# Altium PCB Motherboard_PCB.PcbDoc
Units mm, origin at the board's own origin, x right, y up, seen from the top; angles counter-clockwise.
Board outline 96 x 50 mm, 4 copper layers (Top Layer, Int1 (GND), Int2 (PWR), Bottom Layer), stack 1.369 mm thick; 50 components, 45 nets, 278 pads, 30 vias.
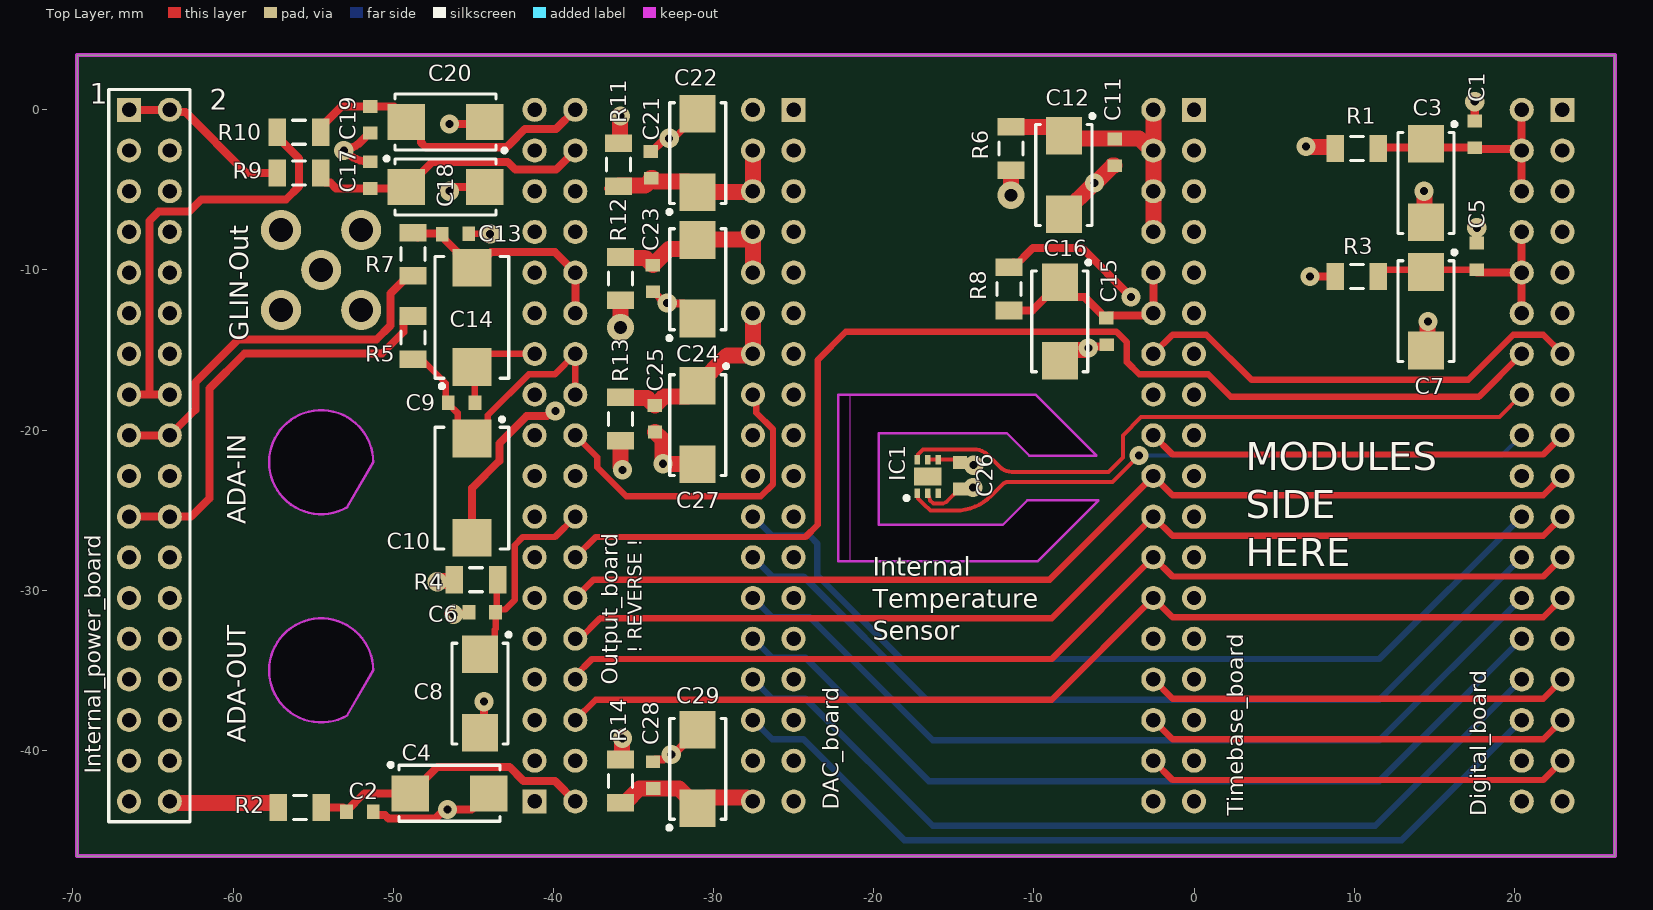
[diagram p0: Top Layer view]
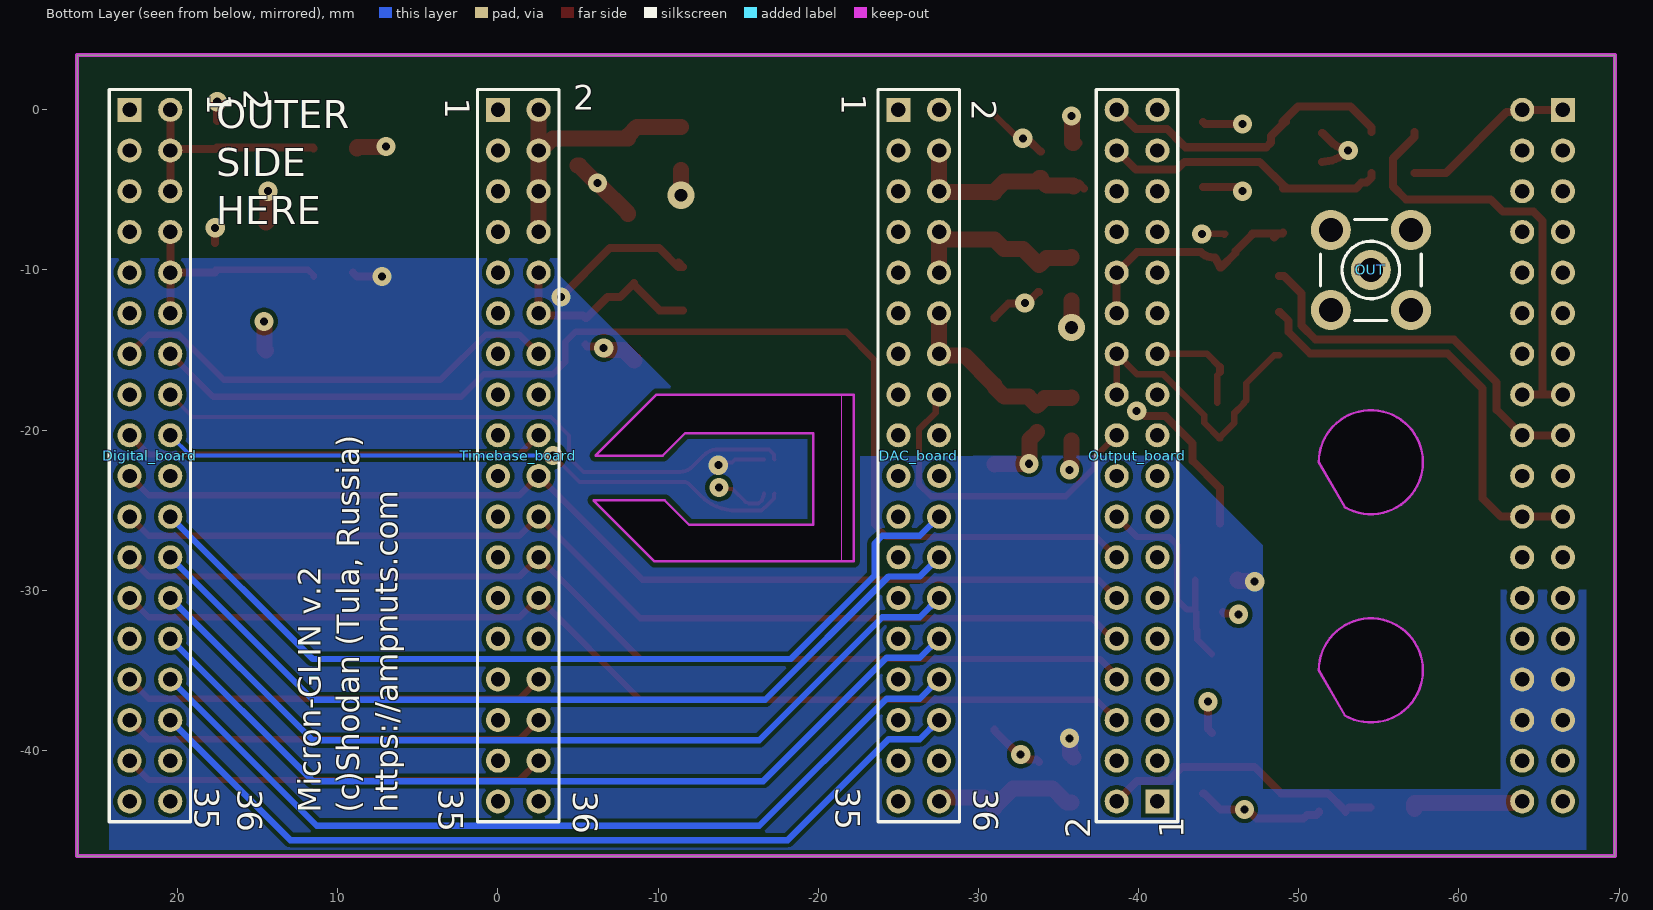
[diagram p1: Bottom Layer view, seen from below]
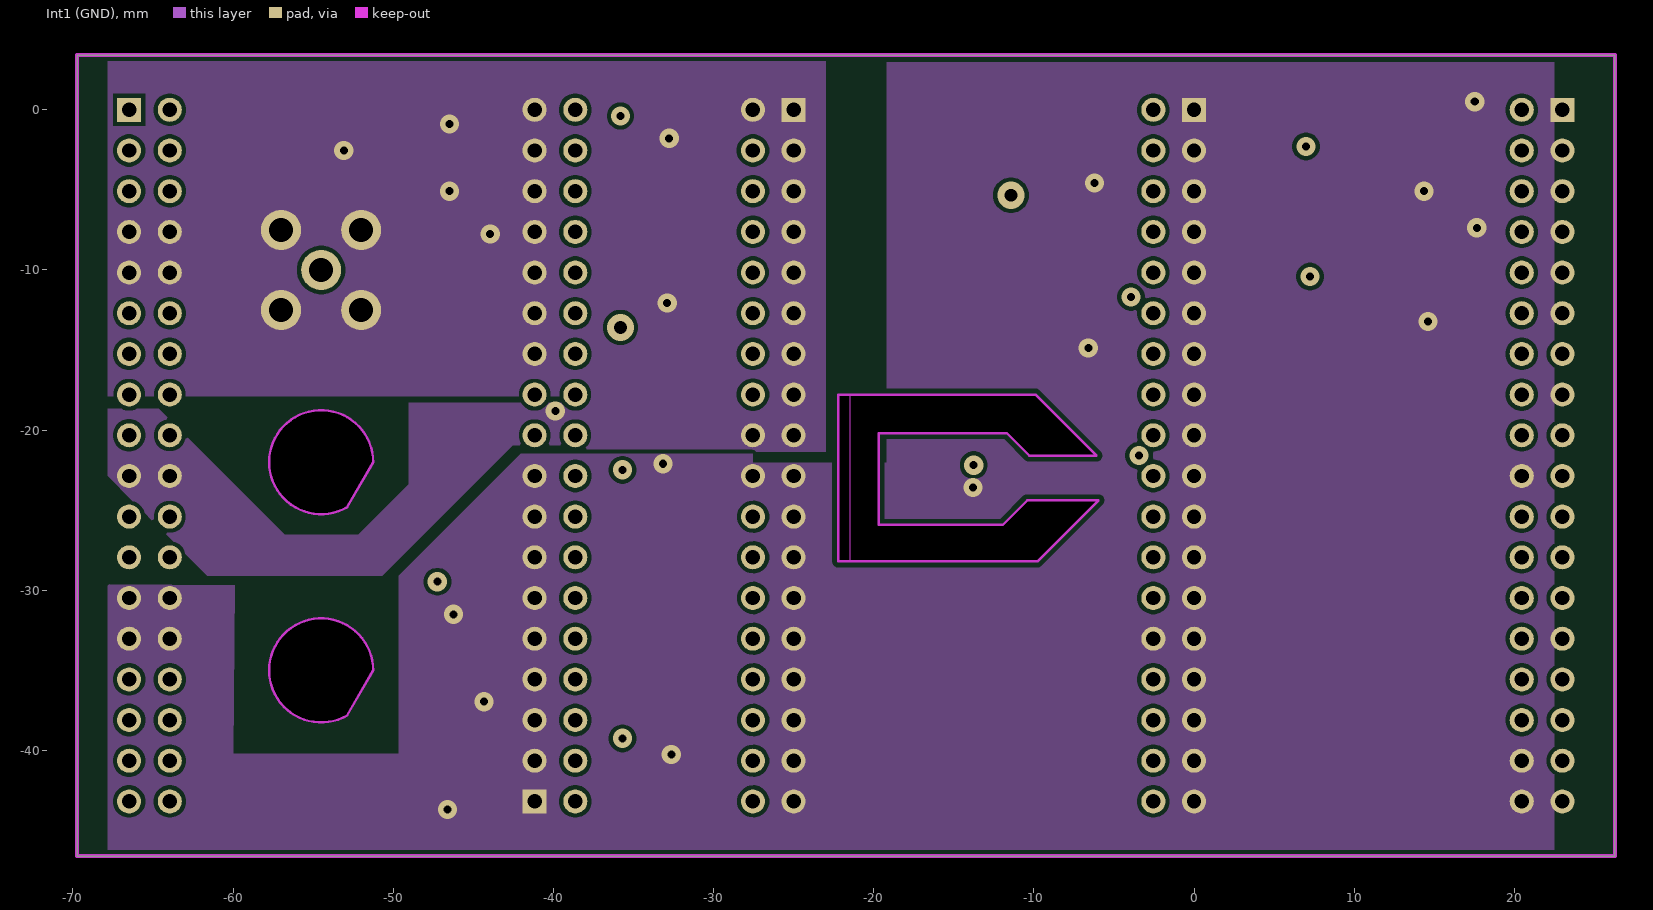
[diagram p2: Int1 (GND)]
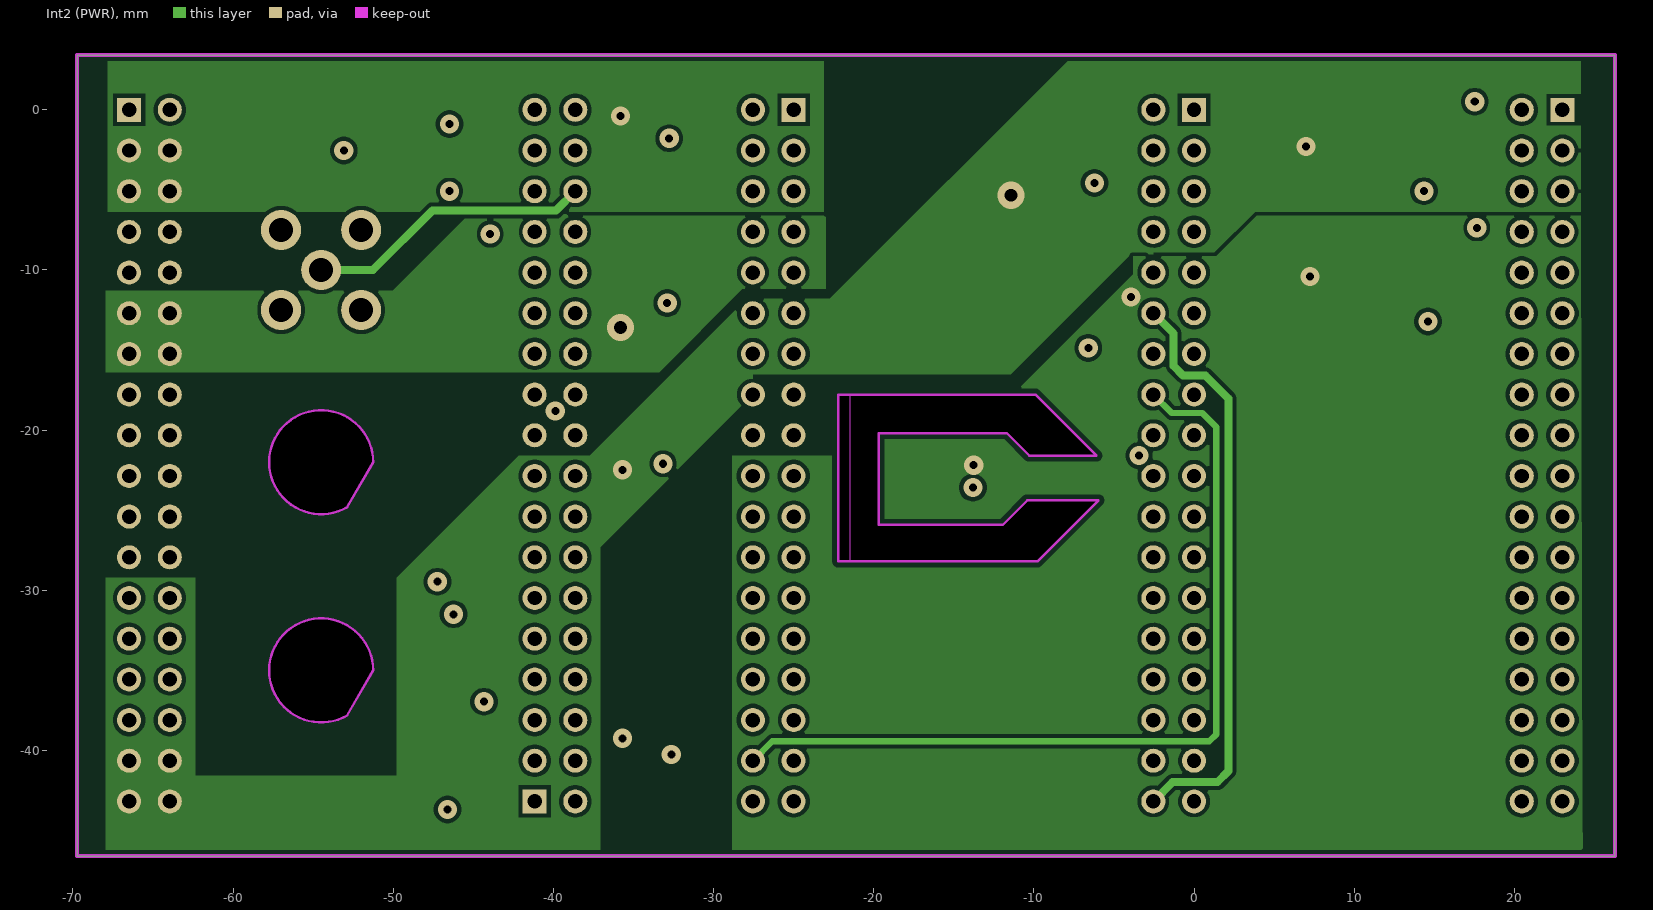
[diagram p3: Int2 (PWR)]

## Layer stack, top to bottom
Top Solder: solder mask 0.0254, SM-001, Dk 4
Top Layer: signal copper 0.035
Dielectric 1: prepreg 0.1295, PP-017, Dk 4.3
Dielectric 2: prepreg 0.1295, PP-017, Dk 4.3
Int1 (GND): signal copper 0.035
Dielectric 3: core 0.7112, Core-039, Dk 4.8
Int2 (PWR): signal copper 0.035
Dielectric 4: prepreg 0.1295, PP-017, Dk 4.3
Dielectric 5: prepreg 0.1295, PP-017, Dk 4.3
Bottom Layer: signal copper 0.035
Bottom Solder: solder mask 0.0254, SM-001, Dk 4

## Board outline
-69.73,-46.59 -69.73,3.41 26.27,3.41 26.27,-46.59
cut-out: -52.875,-37.815 cw(c-54.5,-35) -51.25,-35
cut-out: -52.875,-24.815 cw(c-54.5,-22) -51.25,-22
cut-out: -22.225,-28.194 -22.225,-17.78 -9.906,-17.78 -6.096,-21.59 -10.287,-21.59 -11.684,-20.193 -19.685,-20.193 -19.685,-25.908 -11.938,-25.908 -10.414,-24.384 -5.969,-24.384 -9.779,-28.194
cut-out: -21.463,-28.194 -21.463,-17.78 -9.906,-17.78 -6.096,-21.59 -10.287,-21.59 -11.684,-20.193 -19.685,-20.193 -19.685,-25.908 -11.938,-25.908 -10.414,-24.384 -5.969,-24.384 -9.779,-28.194

## Design rules (kind name [scope] priority, off if disabled: settings)
BoardOutlineClearance [All] p1: gap=0.381 ignorepadtopadclearanceinfootprint=FALSE
Clearance "Clearance Polygons" [InPolygon] p1: gap=0.254 ignorepadtopadclearanceinfootprint=FALSE except(0: Arc-Hole Track-Hole SMDPad-Hole THPad-Hole Via-Hole Fill-Hole Poly-Hole Region-Hole Text-Hole)
Clearance [All] p2: gap=0.2 ignorepadtopadclearanceinfootprint=FALSE
ComponentClearance "HM-TRP & UFL" [InComponent('X1') vs InComponent('U1')] p1: gap=0 collisioncheckmode=3 verticalgap=0 showdistances=FALSE
ComponentClearance [All] p2: gap=0.025 collisioncheckmode=3 verticalgap=0.025 showdistances=FALSE
DiffPairsRouting [All] p1: maxlimit=10 minlimit=0.127 mostfreqgap=0.203 toplayer_minwidth=0.127 toplayer_maxwidth=0.381 toplayer_prefwidth=0.203 midlayer1_minwidth=0.127 midlayer1_maxwidth=0.381 midlayer1_prefwidth=0.203 midlayer2_minwidth=0.127 midlayer2_maxwidth=0.381 midlayer2_prefwidth=0.203 bottomlayer_minwidth=0.127 bottomlayer_maxwidth=0.381 bottomlayer_prefwidth=0.203 maxuncoupledlength=12.7
HoleSize [All] p1: absolutevalues=TRUE maxlimit=6.731 minlimit=0.254 maxpercent=80.000 minpercent=20.000
HoleToHoleClearance [All] p1: gap=0.254 allowstackedmicrovias=FALSE
MinimumAnnularRing [All] p1: minimumring=0.102
MinimumSolderMaskSliver [All] p1: minsoldermaskwidth=0
PlaneClearance [All] p1: clearance=0.254
PlaneConnect [All] p1: planeconnectstyle=Relief reliefexpansion=0.102 reliefentries=4 reliefconductorwidth=0.152 reliefairgap=0.152
PolygonConnect PolygonConnect_pwr_gnd [IsPoly] p1: thpad.connectstyle=Direct thpad.reliefconductorwidth=0.254 thpad.reliefentries=4 thpad.polygonreliefangle="90 Angle" thpad.airgapwidth=0.152 smdpad.connectstyle=Relief smdpad.reliefconductorwidth=0.254 smdpad.reliefentries=4 smdpad.polygonreliefangle="90 Angle" smdpad.airgapwidth=0.152 via.connectstyle=Direct via.reliefconductorwidth=0.254 via.reliefentries=4 via.polygonreliefangle="90 Angle" via.airgapwidth=0.152
PolygonConnect PolygonConnect_1 [All] p2: connectstyle=Relief reliefconductorwidth=0.254 reliefentries=4 polygonreliefangle="90 Angle" airgapwidth=0.254
PolygonConnect "Via connect style" [isVia] p3: connectstyle=Direct reliefconductorwidth=0.254 reliefentries=4 polygonreliefangle="90 Angle" airgapwidth=0.254
RoutingCorners [All] p1: cornerstyle=45-Degree minsetback=1.25 maxsetback=1.25
RoutingVias [All] p1: holewidth=0.305 width=0.559 viastyle="Through Hole" minholewidth=0.254 minwidth=0.457 maxholewidth=2.54 maxwidth=2.896
SilkToSilkClearance [All] p1: silktosilkclearance=0
SilkToSolderMaskClearance [IsPad] p1: minsilkscreentomaskgap=0.127 clearancetoexposedcopper=TRUE
SolderMaskExpansion [All] p1: expansion=0.064 istentingtop=FALSE
Width GND [InNet('GND')] p1: maxlimit=0.762 minlimit=0.254 preferedwidth=0.508
Width Power [InNetClass('Power')] p2: maxlimit=1.016 minlimit=0.508 preferedwidth=0.762
Width 3V3 [InNetClass('3V3')] p3: maxlimit=0.762 minlimit=0.254 preferedwidth=0.508
Width [All] p4: maxlimit=10.16 minlimit=0.25 preferedwidth=0.25
20 further rules are at their usual default settings.

## Components (designator, comment, footprint, x,y, rotation, side; value= is the part's Value field where it differs from the comment)
C1 "100nF 25V (0603)" "CAP 0603" 17.526,-1.524 r90 top
C2 "100nF 25V (0603)" "CAP 0603" -52.07,-43.815 r0 top
C3 "10uF 16V C" CAPMP6032X280N 14.478,-4.572 r270 top
C4 "10uF 16V C" CAPMP6032X280N -46.482,-42.672 r0 top
C5 "100nF 25V (0603)" "CAP 0603" 17.653,-9.144 r90 top
C6 "100nF 25V (0603)" "CAP 0603" -44.45,-31.369 r180 top
C7 "10uF 16V C" CAPMP6032X280N 14.478,-12.573 r270 top
C8 "10uF 16V C" CAPMP6032X280N -44.577,-36.449 r270 top
C9 "100nF 100V (0603)" "CAP 0603" -45.72,-18.288 r0 top
C10 "2.2uF 50V D" CAPMP7343X310N -45.085,-23.622 r270 top
C11 "100nF 25V (0603)" "CAP 0603" -4.953,-2.667 r270 top
C12 "10uF 16V C" CAPMP6032X280N -8.128,-4.064 r270 top
C13 "100nF 100V (0603)" "CAP 0603" -46.101,-7.747 r0 top
C14 "2.2uF 50V D" CAPMP7343X310N -45.085,-12.954 r90 top
C15 "100nF 25V (0603)" "CAP 0603" -5.461,-13.843 r270 top
C16 "10uF 16V C" CAPMP6032X280N -8.382,-13.208 r270 top
C17 "100nF 25V (0603)" "CAP 0603" -51.435,-4.064 r90 top
C18 "10uF 16V C" CAPMP6032X280N -46.736,-4.826 r0 top
C19 "100nF 25V (0603)" "CAP 0603" -51.435,-0.635 r270 top
C20 "10uF 16V C" CAPMP6032X280N -46.736,-0.762 r180 top
C21 "100nF 100V (0603)" "CAP 0603" -33.909,-3.429 r90 top
C22 "10uF 35V C" CAPMP6032X280N -30.988,-2.704 r90 top
C23 "100nF 100V (0603)" "CAP 0603" -33.782,-10.541 r270 top
C24 "10uF 35V C" CAPMP6032X280N -30.988,-10.578 r90 top
C25 "100nF 25V (0603)" "CAP 0603" -33.655,-19.304 r270 top
C26 "100nF 25V (0603)" "CAP 0603" -14.605,-22.86 r270 top
C27 "10uF 16V C" CAPMP6032X280N -30.988,-19.685 r270 top
C28 "100nF 25V (0603)" "CAP 0603" -33.782,-41.529 r90 top
C29 "10uF 16V C" CAPMP6032X280N -30.988,-41.148 r90 top
DAC_board "Header 18X2" HDR2X18 -25,0 r270 bottom locked
Digital_board "Header 18X2" HDR2X18 23,0 r270 bottom locked
IC1 "TMP117AIDRVT" SON65P200X200X80-7N-D -16.622,-22.894 r90 top
Internal_power_board "Header 18X2" HDR2X18 -66.49,0 r270 top
OUT "SMB" SMB_V-RJ45 -54.5,-10 r180 bottom locked
Output_board "Header 18X2" HDR2X18 -41.17,-43.18 r90 bottom
R1 "FB 600R BLM31PG601SN1L" C1206 10.16,-2.413 r180 top
R2 "FB 600R BLM31PG601SN1L" C1206 -55.833,-43.561 r180 top
R3 "FB 600R BLM31PG601SN1L" C1206 10.16,-10.414 r180 top
R4 "FB 600R BLM31PG601SN1L" C1206 -44.831,-29.337 r180 top
R5 "FB 600R BLM31PG601SN1L" C1206 -48.768,-14.224 r90 top
R6 "FB 600R BLM31PG601SN1L" C1206 -11.43,-2.413 r270 top
R7 "FB 600R BLM31PG601SN1L" C1206 -48.768,-9.017 r270 top
R8 "FB 600R BLM31PG601SN1L" C1206 -11.557,-11.176 r90 top
R9 "FB 600R BLM31PG601SN1L" C1206 -55.88,-3.937 r180 top
R10 "FB 600R BLM31PG601SN1L" C1206 -55.88,-1.397 r180 top
R11 "FB 600R BLM31PG601SN1L" C1206 -35.941,-3.429 r90 top
R12 "FB 600R BLM31PG601SN1L" C1206 -35.814,-10.541 r270 top
R13 "FB 600R BLM31PG601SN1L" C1206 -35.814,-19.304 r270 top
R14 "FB 600R BLM31PG601SN1L" C1206 -35.814,-41.91 r90 top
Timebase_board "Header 18X2" HDR2X18 0,0 r270 bottom locked

## Footprints (in the part's own frame and the unit in brackets; to place one, negate y for a bottom-side part, rotate by r counter-clockwise, add the part's x,y. Pads: shape width x height; smd on the part's side, far side on the other; paste and mask are expansions set on the pad)
C1206 [mm]
  rect 1.1x1.7 smd: 1(-1.35,0) 2(1.35,0)
  silkscreen extent -0.4,-0.75 0.4,0.75, body extent -1.7,-0.9 1.7,0.9, height 1.3
"CAP 0603" [mm]
  rect 0.8x0.9 smd: 1(-0.84,-0.01) 2(0.82,0)
  body extent -0.85,-0.45 0.85,0.45, height 0.8
CAPMP6032X280N [mm] "Capacitor, Polarized, Molded  Body 6.0x3.2mm, IPC Medium Density"
  rect 2.35x2.25 smd: 1(-2.45,0) 2(2.45,0)
  silkscreen extent -3.8,-1.75 3.15,1.9, body extent -3.15,-1.75 3.15,1.75, height 2.8
CAPMP7343X310N [mm] "Capacitor, Polarized, Molded  Body 7.3x4.3mm, IPC Medium Density"
  rect 2.35x2.45 smd: 1(-3.1,0) 2(3.1,0)
  silkscreen extent -4.42,-2.3 3.8,2.3, body extent -3.8,-2.3 3.8,2.3, height 3.1
HDR2X18 [mm] "Connector; Header; 18x2 Position"
  rect 1.5x1.5 hole 0.9: 1(0,0)
  round 1.5 hole 0.9: 2(0,2.54) 3(2.54,0) 4(2.54,2.54) 5(5.08,0) 6(5.08,2.54) 7(7.62,0) 8(7.62,2.54) 9(10.16,0) 10(10.16,2.54) 11(12.7,0) 12(12.7,2.54) 13(15.24,0) 14(15.24,2.54) 15(17.78,0) 16(17.78,2.54) 17(20.32,0) 18(20.32,2.54) 19(22.86,0) 20(22.86,2.54) 21(25.4,0) 22(25.4,2.54) 23(27.94,0) 24(27.94,2.54) 25(30.48,0) 26(30.48,2.54) 27(33.02,0) 28(33.02,2.54) 29(35.56,0) 30(35.56,2.54) 31(38.1,0) 32(38.1,2.54) 33(40.64,0) 34(40.64,2.54) 35(43.18,0) 36(43.18,2.54)
  silkscreen extent -1.27,-1.27 44.45,3.81
SMB_V-RJ45 [mm] "Connector; SMB Straight"
  round 2.5 hole 1.5: 1(0,0) 2(-2.5,-2.5) 2(-2.5,2.5) 2(2.5,-2.5) 2(2.5,2.5)
  silkscreen extent -3.15,-3.15 3.15,3.15
SON65P200X200X80-7N-D [mm]
  rect 0.6x0.35 smd: 1(-1.05,0.65) 2(-1.05,0) 3(-1.05,-0.65) 4(1.05,-0.65) 5(1.05,0) 6(1.05,0.65)
  rect 1.1x1.7 smd: 7(0,0)
  silkscreen extent -1.47,1.2 -1.23,1.45, body extent -1.05,-1 1.05,1, height 0.8

## Part data
C1 C2 C5 C6 C9 C11 C13 C15 C17 C19 C21 C23 C25 C26 C28: library part "Cap Semi", "Capacitor (Semiconductor SIM Model)", LatestRevisionDate=29-May-2009, LatestRevisionNote="IPC-7351 Footprint Added.", Order=CC0603KRX7R8BB104, PackageDescription="Chip Capacitor", PackageReference=C1206, Published=8-Jun-2000, Publisher="Altium Limited"
C3 C4 C7 C8 C12 C16 C18 C20 C22 C24 C27 C29: library part CTE6032-28_10UF_25V_10%_LESR0500, "Polarised capacitor", Case=C, Manufacturer=GENERIC, Manufacturer1 ComponentHeight=2.8mm, Manufacturer1 Example=AVX, Manufacturer1 Part Number=TPSC106K025R0500, Tolerance=±10%, Voltage=25V, Author="CERN DEM JLC", Component Type=Standard, CreateDate=05.05.2008, HelpURL=\\cern.ch\dfs\Applications\Altium\Datasheets\CTE-LESR_AVX_TPS.pdf, LatestRevisionDate=20.01.2009, Manufacturer Part Number=CTE6032-28_10UF_25V_10%_LESR0500, Mounted=Yes, Part Description="Low ESR 0R5 Solid Tantalum Chip Capacitor", Part Number=CTE6032-28_10UF_25V_10%_LESR0500, Pin Count=2, Sense=No, SMD=Yes, Socket=No, Status=Preferred
C10 C14: library part CTE7343-31_22UF_35V_20%_LESR0400, "Polarised capacitor", Case=D, Manufacturer=GENERIC, Manufacturer1 ComponentHeight=3.1mm, Manufacturer1 Example=AVX, Manufacturer1 Part Number=TPSD226M035R0400, Tolerance=±20%, Voltage=35V, Author="CERN DEM MR", Component Type=Standard, CreateDate=19.05.2016, HelpURL=\\cern.ch\dfs\Applications\Altium\Datasheets\CTE-LESR_AVX_TPS.pdf, LatestRevisionDate=19.05.2016, Manufacturer Part Number=CTE7343-31_22UF_35V_20%_LESR0400, Mounted=Yes, Part Description="Low ESR 0R4 Solid Tantalum Chip Capacitor", Part Number=CTE7343-31_22UF_35V_20%_LESR0400, Pin Count=2, Sense=No, SMD=Yes, Socket=No, Status=None
DAC_board Digital_board Internal_power_board Output_board Timebase_board: "Header, 18-Pin, Dual row", LatestRevisionDate=17-Jul-2002, LatestRevisionNote="Re-released for DXP Platform.", Publisher="Altium Limited", System=Connector
IC1: "Integrated Circuit", Manufacturer_Name="Texas Instruments", Mouser Part Number=595-TMP117AIDRVT, Arrow Part Number=TMP117AIDRVT, Arrow Price/Stock=https://www.arrow.com/en/products/tmp117aidrvt/texas-instruments?region=nac, Datasheet Link=https://www.arrow.com/en/products/tmp117aidrvt/texas-instruments, Height=0.8mm, Manufacturer_Part_Number=TMP117AIDRVT, Mouser Price/Stock=https://www.mouser.co.uk/ProductDetail/Texas-Instruments/TMP117AIDRVT?qs=qSfuJ%252Bfl%2Fd7VBuV3yl1aHg%3D%3D
OUT: "SMB Straight Connector", LatestRevisionDate=17-Jul-2002, LatestRevisionNote="Re-released for DXP Platform.", Publisher="Altium Limited"
R1 R2 R3 R4 R5 R6 R7 R8 R9 R10 R11 R12 R13 R14: library part "Resistor 0805", Avail=20, Order=CR0603-JW-220GLF

## Via types
v1: diameter 1.2, hole 0.5, Top Layer to Bottom Layer, tented both sides, 28 vias
v2: diameter 1.7, hole 0.8, Top Layer to Bottom Layer, tented both sides, 2 vias

## Nets (pads, with @x,y where several pads share a name; then routed paths per layer and width w, separated by ;. In a path a pad name is that pad's centre, name@x,y a point inside that pad or via, vN(x,y) a via of type N, cw(c..) or ccw(c..) an arc to the next point about the centre after c; other vN are vias at no path point)
+3.3V: C26.1 IC1.4 IC1.5 Internal_power_board.29 Internal_power_board.30 Internal_power_board.31 Internal_power_board.32 R3.2 R4.2 R8.2 R14.2 | length 17.7
  Top Layer w0.25: IC1.5 IC1.4 -14.791,-21.844 C26.1 -13.921,-22.02 v1@-13.589,-22.352
  Top Layer w0.5: R14.2@-36.114,-40.56 R14.2 ; R8.2@-11.263,-9.532 R8.2 -11.257,-9.826 -10.067,-8.636 -6.985,-8.636 v1(-3.937,-11.684) ; v1(7.239,-10.414) R3.2 R3.2@9.064,-10.16
  Top Layer w1: v1(-47.244,-29.464) -47.206,-29.426 -46.231,-29.426 -46.181,-29.376 R4.2 ; R14.2@-35.941,-40.433 -35.725,-40.217 -35.725,-39.281 v1(-35.687,-39.243)
  other v1: -13.755,-22.186
+5V: Internal_power_board.33 Internal_power_board.34 Internal_power_board.35 Internal_power_board.36 R1.2 R2.2 R6.2 R13.2 | length 12.6
  Top Layer w1: Internal_power_board.36 -63.854,-43.276 -57.233,-43.276 -57.183,-43.326 R2.2 -57.183,-43.6 R2.2@-57.233,-43.65 ; R13.2 -35.814,-22.298 -35.687,-22.425 v1(-35.687,-22.479) v1@-35.649,-22.441 ; v2@-11.468,-5.296 v2(-11.43,-5.334) R6.2 ; v1(6.985,-2.286) 7.023,-2.324 8.76,-2.324 8.81,-2.374 R1.2
+7.5V: Internal_power_board.1 Internal_power_board.2 R9.2 | length 10.9
  Top Layer w0.5: Internal_power_board.1 Internal_power_board.2 -63.805,-0.145 -62.974,-0.145 -59.182,-3.937 R9.2
+15V: Internal_power_board.3 Internal_power_board.4 Internal_power_board.5 Internal_power_board.6 R11.2 | length 2.1
  Top Layer w0.5: R11.2@-36.241,-2.079 R11.2
  Top Layer w1: R11.2 -35.902,-2.079 -35.852,-2.029 -35.852,-0.419 v1(-35.814,-0.381)
+30V: Internal_power_board.21 Internal_power_board.22 R5.2 | length 27.4
  Top Layer w0.5: Internal_power_board.21 Internal_power_board.22 -62.611,-25.4 -61.468,-24.257 -61.468,-17.399 -59.27,-15.201 -50.685,-15.201 -49.368,-13.884 -49.368,-13.174 -48.814,-12.62 R5.2@-48.768,-12.62
-7.5V: Internal_power_board.15 Internal_power_board.16 R10.2 | length 27.6
  Top Layer w0.5: Internal_power_board.15 -65.22,-17.78 ; Internal_power_board.16 -65.22,-17.78 ; R10.2 -57.23,-1.697 -55.88,-3.047 -55.88,-4.787 -56.681,-5.588 -61.976,-5.588 -62.738,-6.35 -64.643,-6.35 -65.22,-6.927 -65.22,-17.78
-15V: Internal_power_board.11 Internal_power_board.12 Internal_power_board.13 Internal_power_board.14 R12.2 | length 1.7
  Top Layer w1: v2(-35.814,-13.589) R12.2
-30V: Internal_power_board.17 Internal_power_board.18 R7.2 | length 24
  Top Layer w0.5: Internal_power_board.17 Internal_power_board.18 -62.357,-18.727 -62.357,-17.018 -59.69,-14.351 -51.054,-14.351 -50.165,-13.462 -50.165,-11.464 -49.068,-10.367 R7.2
AGND: C9.2 C10.2 C13.2 C14.1 C17.2 C18.2 C19.2 C20.1 C21.2 C22.2 C23.2 C24.1 DAC_board.1 DAC_board.2 DAC_board.3 DAC_board.5 DAC_board.7 DAC_board.9 DAC_board.11 DAC_board.13 DAC_board.15 DAC_board.17 DAC_board.18 Internal_power_board.7 Internal_power_board.8 Internal_power_board.9 Internal_power_board.10 Internal_power_board.19 Internal_power_board.20 OUT.2 Output_board.23 Output_board.25 Output_board.27 Output_board.29 Output_board.31 Output_board.33 Output_board.35 | length 34.5
  Top Layer w0.4: C13.2@-45.344,-7.81 -45.408,-7.747 v1(-43.942,-7.747) ; C14.1@-45.085,-16.383 -44.9,-16.568 C9.2 ; C14.1 -44.271,-15.24 Output_board.23 ; v1(-32.766,-1.778) -32.613,-1.625 -32.309,-1.625 -30.988,-0.304 C22.2
  Top Layer w0.5: v1(-53.086,-2.54) -52.952,-2.406 ccw(c-52.952,-1.16) -52.071,-2.041 -51.485,-1.455 C19.2 ; v1@-53.051,-2.575 ccw(c-51.435,-0.958) -51.637,-3.235 -51.635,-3.235 C17.2 ; v1(-46.482,-5.08) -46.293,-5.08 -46.039,-4.826 C18.2@-44.032,-4.826 ; v1(-46.482,-0.889) -44.159,-0.889 C20.1@-44.032,-0.762 ; C10.2@-45.085,-25.833 -45.085,-23.622 -43.376,-21.913 -43.376,-20.829 -41.667,-19.12 -40.391,-19.12 -40.067,-18.796 v1(-39.878,-18.796) ; C14.1@-45.085,-16.383 C14.1 ; C21.2 -33.859,-2.609 -33.162,-1.912 -32.9,-1.912 v1(-32.766,-1.778) ; C23.2 -33.732,-11.361 -33.028,-12.065 v1(-32.893,-12.065) -32.855,-12.103 -31.863,-12.103 -30.988,-12.978 C24.1@-30.988,-12.991
Control_bus_0: Digital_board.19 Output_board.12 Timebase_board.20 | length 65.8
  Top Layer w0.4: Output_board.12 -37.48,-29.33 -9.01,-29.33 Timebase_board.20 -1.34,-24.06 21.8,-24.06 Digital_board.19
Control_bus_1: Digital_board.21 Output_board.10 Timebase_board.22 | length 65.8
  Top Layer w0.4: Output_board.10 -38.354,-33.02 -37.084,-31.75 -8.89,-31.75 Timebase_board.22 -1.34,-26.6 21.8,-26.6 Digital_board.21
Control_bus_2: Digital_board.23 Output_board.8 Timebase_board.24 | length 65.9
  Top Layer w0.4: Output_board.8 -38.63,-35.328 -37.592,-34.29 -8.89,-34.29 Timebase_board.24 -1.34,-29.14 21.8,-29.14 Digital_board.23
Control_bus_3: Digital_board.25 Output_board.6 Timebase_board.26 | length 65.8
  Top Layer w0.4: Output_board.6 -37.36,-36.83 -8.89,-36.83 Timebase_board.26 -1.34,-31.68 21.8,-31.68 Digital_board.25
COUNT_EN: Digital_board.13 Timebase_board.14 | length 28.9
  Top Layer w0.4: Timebase_board.14 -1.34,-14.04 0.762,-14.04 3.585,-16.863 17.116,-16.863 19.939,-14.04 21.8,-14.04 Digital_board.13
CPU_IRQ: Digital_board.17 Timebase_board.18 | length 26.5
  Top Layer w0.4: Timebase_board.18 -1.34,-21.52 21.8,-21.52 Digital_board.17
DAC_ALARM: DAC_board.32 Digital_board.32 | length 54.2
  Bottom Layer w0.4: DAC_board.32 -26.34,-39.3 -24.384,-39.3 -18.091,-45.593 12.967,-45.593 Digital_board.32
DAC_CLR: DAC_board.30 Digital_board.30 | length 55.6
  Bottom Layer w0.4: DAC_board.30 -26.34,-36.76 -24.257,-36.76 -16.313,-44.704 11.316,-44.704 Digital_board.30
DAC_LDAC: DAC_board.34 Timebase_board.16 | length 53.6
  Int2 (PWR) w0.4: DAC_board.34 -26.334,-39.433 0.953,-39.433 1.397,-38.989 1.397,-19.812 0.515,-18.93 -1.39,-18.93 Timebase_board.16
DGND: C1.2 C2.2 C3.2 C4.2 C5.2 C6.2 C7.2 C8.2 C11.2 C12.2 C15.2 C16.2 C25.2 C26.2 C27.2 C28.2 C29.2 DAC_board.19 DAC_board.20 DAC_board.21 DAC_board.23 DAC_board.25 DAC_board.27 DAC_board.29 DAC_board.31 DAC_board.33 DAC_board.35 Digital_board.1 Digital_board.3 Digital_board.5 Digital_board.7 Digital_board.9 Digital_board.11 Digital_board.15 Digital_board.20 Digital_board.27 Digital_board.34 Digital_board.35 Digital_board.36 IC1.2 Internal_power_board.25 Internal_power_board.26 Internal_power_board.27 Internal_power_board.28 Output_board.1 Output_board.3 Output_board.5 Output_board.7 Output_board.9 Output_board.11 Output_board.13 Output_board.15 Output_board.17 Timebase_board.1 Timebase_board.3 Timebase_board.5 Timebase_board.7 Timebase_board.9 Timebase_board.11 Timebase_board.13 Timebase_board.15 Timebase_board.17 Timebase_board.19 Timebase_board.21 Timebase_board.23 Timebase_board.25 Timebase_board.27 Timebase_board.28 Timebase_board.29 Timebase_board.31 Timebase_board.33 Timebase_board.35 | length 37.1
  Top Layer w0.25: IC1.2 -16.572,-24.119 -16.472,-24.379 -16.282,-24.569 -15.662,-24.569 -15.471,-24.496 -14.655,-23.68 C26.2 -13.901,-23.68 v1@-13.716,-23.495
  Top Layer w0.5: C2.2 -51.25,-43.865 -51.1,-44.015 -50.525,-44.015 -50.293,-44.247 -47.357,-44.247 -46.798,-43.688 v1(-46.609,-43.688) -45.098,-43.688 -44.082,-42.672 C4.2 ; v1(-46.228,-31.496) -46.164,-31.432 -45.334,-31.432 C6.2 ; C8.2 -44.323,-38.645 v1(-44.323,-36.957) ; C28.2 -33.632,-40.559 -33.128,-40.559 -32.828,-40.259 -32.499,-40.259 -30.988,-38.748 C29.2 ; v1@-6.604,-14.859 -6.508,-14.763 -5.561,-14.763 C15.2 ; C1.2 v1(17.526,0.508) ; C5.2 v1@17.653,-7.112
  Top Layer w1: C25.2 -33.185,-20.594 -33.185,-22.06 -33.129,-22.116 -31.007,-22.116 C27.2 ; C16.2@-8.509,-15.658 -7.834,-14.983 -6.778,-14.983 -6.658,-14.863 v1(-6.604,-14.863) ; C12.2 -8.128,-6.464 -6.236,-4.572 -6.169,-4.572 -5.084,-3.487 C11.2 ; v1(14.351,-5.08) 14.389,-5.118 14.389,-6.933 C3.2 ; C7.2 14.567,-14.934 14.567,-13.246 v1(14.605,-13.208)
  Bottom Layer w0.5: DAC_board.20@-27.55,-22.86 DAC_board.20
  other v1: -32.639,-40.259 -13.808,-23.587 -33.147,-22.098 17.653,-7.366 -6.223,-4.572
NetC1_1: C1.1 C3.1 Digital_board.2 Digital_board.4 Digital_board.6 R1.1 | length 14.1
  Top Layer w0.5: R1.1 11.559,-2.364 C1.1 17.624,-2.452 20.372,-2.452 Digital_board.4 ; Digital_board.6 Digital_board.4 ; Digital_board.2 Digital_board.4
NetC2_1: C2.1 C4.1 Output_board.2 R2.1 | length 17.7
  Top Layer w0.5: R2.1 C2.1@-53.124,-43.561 ; C2.1 -52.91,-43.775 -51.807,-42.672 C4.1 -48.882,-42.672 -47.231,-41.021 -42.747,-41.021 -41.858,-41.91 -39.9,-41.91 Output_board.2
NetC5_1: C5.1 C7.1 Digital_board.8 Digital_board.10 Digital_board.12 R3.1 | length 14.3
  Top Layer w0.4: R3.1 11.51,-10.334 11.86,-9.984 C5.1
  Top Layer w0.5: C5.1@17.663,-10.16 Digital_board.10 ; Digital_board.12 Digital_board.10 ; Digital_board.8 Digital_board.10
NetC6_1: C6.1 C8.1 Output_board.16 R4.1 | length 14.5
  Top Layer w0.4: C8.1 -43.652,-33.074 -43.652,-32.451 -43.61,-32.409 C6.1 ; R4.1@-43.545,-29.337 -43.545,-31.244 -43.545,-31.294 C6.1 ; Output_board.16 -39.9,-26.67 -41.91,-26.67 -42.418,-27.178 -42.418,-30.607 -43.01,-31.199 -43.45,-31.199 C6.1
NetC9_1: C9.1 C10.1 Output_board.22 Output_board.24 R5.1 | length 18.4
  Top Layer w0.4: R5.1@-48.768,-15.32 -48.468,-15.32 -46.71,-17.078 -46.71,-18.148 C9.1 -46.56,-18.348 -45.983,-18.925 -45.983,-19.547 C10.1@-45.021,-20.509 ; C10.1@-45.035,-20.522 C10.1 -45.062,-20.522 -44.087,-19.547 -44.087,-19.071 -41.526,-16.51 -39.9,-16.51 Output_board.24 Output_board.22
NetC11_1: C11.1 C12.1 R6.1 Timebase_board.2 Timebase_board.4 Timebase_board.6 Timebase_board.8 | length 17.1
  Top Layer w1: R6.1 -8.679,-1.063 C12.1 ; C12.1@-8.128,-1.778 -4.963,-1.778 -3.437,-1.778 -2.675,-2.54 Timebase_board.4 ; Timebase_board.6@-2.603,-5.143 Timebase_board.6 ; Timebase_board.8 Timebase_board.6 ; Timebase_board.2 Timebase_board.4 ; Timebase_board.6 Timebase_board.4
NetC13_1: C13.1 C14.2 Output_board.26 Output_board.28 R7.1 | length 15.3
  Top Layer w0.5: R7.1@-49.022,-7.667 -48.977,-7.712 -48.703,-7.712 -47.113,-7.712 -47.068,-7.757 -47.068,-7.807 -46.06,-8.815 -46.06,-8.929 -45.135,-9.854 C14.2 -44.909,-9.484 -44.777,-9.207 ccw(c-44.664,-8.111) -43.885,-8.89 -39.9,-8.89 Output_board.28 Output_board.26 ; R7.1@-48.703,-7.732 R7.1@-48.468,-7.967
NetC15_1: C15.1 C16.1 R8.1 Timebase_board.10 Timebase_board.12 Timebase_board.36 | length 50.2
  Top Layer w0.5: R8.1 -10.1,-12.526 -8.509,-10.935 -8.509,-10.808 -7.634,-11.683 -6.841,-11.683 -5.521,-13.003 C15.1 -5.321,-12.853 -2.693,-12.853 Timebase_board.12 Timebase_board.10
  Int2 (PWR) w0.5: Timebase_board.36 -1.34,-41.98 1.454,-41.98 2.159,-41.275 2.159,-18.034 0.705,-16.58 -0.692,-16.58 -1.27,-16.002 -1.27,-13.97 Timebase_board.12
NetC17_1: C17.1 C18.1 Output_board.34 R9.1 | length 18
  Top Layer w0.5: R9.1 -54.53,-4.237 -54.23,-4.537 -53.93,-4.537 -53.563,-4.904 C17.1 C18.1@-49.01,-4.904 ; C18.1 -49.136,-4.826 -47.561,-3.251 -42.85,-3.251 -42.361,-3.74 -39.83,-3.74 Output_board.34
NetC19_1: C19.1 C20.2 Output_board.36 R10.1 | length 19.2
  Top Layer w0.5: R10.1 -54.53,-1.097 -53.228,0.205 C19.1 -49.949,0.205 C20.2@-48.982,-0.762 ; C20.2 -49.136,-0.762 -48.261,-1.637 -48.261,-2.044 -47.968,-2.337 -42.925,-2.337 -42.747,-2.159 -42.742,-2.159 -41.783,-1.2 -39.83,-1.2 Output_board.36
NetC21_1: C21.1 C22.1 DAC_board.4 DAC_board.6 R11.1 | length 12
  Top Layer w0.5: R11.1@-36.576,-4.906 R11.1@-36.276,-4.606 ; C21.1@-33.961,-4.419 C21.1@-33.899,-4.357
  Top Layer w1: R11.1 -35.891,-4.729 -34.271,-4.729 C21.1@-33.961,-4.419 ; C21.1 -33.823,-4.269 -33.613,-4.479 -31.613,-4.479 -30.988,-5.104 C22.1 -30.951,-5.117 -27.577,-5.117 DAC_board.6 DAC_board.4
NetC23_1: C23.1 C24.2 DAC_board.8 DAC_board.10 R12.1 | length 12.2
  Top Layer w0.5: DAC_board.10@-27.811,-10.16 DAC_board.10
  Top Layer w1: R12.1 -35.764,-9.241 -34.252,-9.241 C23.1 -32.796,-8.705 -31.602,-8.705 -30.988,-8.091 -28.146,-8.091 -27.675,-7.62 DAC_board.8 DAC_board.10
NetC25_1: C25.1 C27.1 DAC_board.12 DAC_board.14 R13.1 | length 12.4
  Top Layer w1: R13.1 -35.764,-18.004 -34.125,-18.004 C25.1 -33.111,-17.91 -31.613,-17.91 -30.988,-17.285 C27.1 -30.988,-17.185 -29.139,-15.336 -27.636,-15.336 DAC_board.14 DAC_board.12
NetC28_1: C28.1 C29.1 DAC_board.36 R14.1 | length 9.6
  Top Layer w1: R14.1 -35.514,-43.26 -34.623,-42.369 -32.167,-42.369 -30.988,-43.548 C29.1 -30.988,-43.551 -30.363,-42.926 -27.929,-42.926 -27.675,-43.18 DAC_board.36
OUT_DAC: DAC_board.16 Output_board.20 | length 20.7
  Top Layer w0.4: Output_board.20 -37.26,-21.69 -37.26,-22.32 -35.45,-24.13 -27.051,-24.13 -26.289,-23.368 -26.289,-19.945 -27.33,-18.904 -27.33,-17.99 DAC_board.16
OUT_GLIN: OUT.1 Output_board.32 | length 17.9
  Int2 (PWR) w0.5: OUT.1@-54.46,-10 -51.275,-10 -47.555,-6.28 -39.83,-6.28 Output_board.32
Relay_cs: Digital_board.14 Output_board.14 | length 74.5
  Top Layer w0.4: Output_board.14 -37.36,-26.67 -24.257,-26.67 -23.495,-25.908 -23.495,-15.621 -21.737,-13.863 -4.845,-13.863 -4.191,-14.517 -4.191,-15.748 -3.429,-16.51 0.889,-16.51 2.292,-17.913 17.786,-17.913 Digital_board.14
SPI1_MISO: DAC_board.22 Digital_board.22 | length 56.5
  Bottom Layer w0.4: DAC_board.22 -26.34,-26.6 -24.003,-26.6 -23.524,-27.079 -23.524,-29.054 -18.288,-34.29 11.57,-34.29 Digital_board.22
SPI1_MOSI: DAC_board.26 Digital_board.26 | length 55.4
  Bottom Layer w0.4: DAC_board.26 -26.34,-31.68 -24.003,-31.68 -16.313,-39.37 11.57,-39.37 Digital_board.26
SPI1_NSS: DAC_board.24 Digital_board.24 | length 55.4
  Bottom Layer w0.4: DAC_board.24 -26.34,-29.14 -24.384,-29.14 -16.694,-36.83 11.57,-36.83 Digital_board.24
SPI1_SCK: DAC_board.28 Digital_board.28 | length 55.4
  Bottom Layer w0.4: DAC_board.28 -26.34,-34.22 -24.257,-34.22 -16.567,-41.91 11.57,-41.91 Digital_board.28
SPI2_MOSI: Digital_board.31 Timebase_board.32 | length 26.5
  Top Layer w0.4: Timebase_board.32 -1.34,-39.3 21.8,-39.3 Digital_board.31
SPI2_NSS: Digital_board.29 Timebase_board.30 | length 26.5
  Top Layer w0.4: Timebase_board.30 -1.34,-36.76 21.8,-36.76 Digital_board.29
SPI2_SCK: Digital_board.33 Timebase_board.34 | length 26.5
  Top Layer w0.4: Timebase_board.34 -1.34,-41.84 21.8,-41.84 Digital_board.33
TMP117_SCL: Digital_board.18 IC1.1 | length 40.1
  Top Layer w0.25: IC1.1 -17.222,-23.994 -17.222,-24.279 -17.024,-24.477 ccw(c-15.717,-23.173) -16.882,-24.605 -16.468,-25.019 -15.72,-25.019 ccw(c-15.717,-23.173) -15.717,-25.019 ; -15.716,-25.019 -14.891,-25.019 -14.89,-25.019 ccw(c-14.888,-21.883) -12.669,-24.099 -11.938,-23.368 cw(c-11.631,-23.675) -11.631,-23.241 -5.08,-23.241 v1(-3.429,-21.59)
  Bottom Layer w0.25: v1(-3.429,-21.59) 19.19,-21.59 Digital_board.18
TMP117_SDA: Digital_board.16 IC1.6 | length 41.5
  Top Layer w0.25: IC1.6 -17.222,-21.794 -17.222,-21.509 -16.922,-21.209 -13.747,-21.209 cw(c-13.747,-22.51) -12.826,-21.591 -12.119,-22.298 ccw(c-11.377,-21.559) -11.377,-22.606 -5.334,-22.606 -4.445,-21.717 -4.445,-20.32 -3.302,-19.177 8.445,-19.177 19.063,-19.177 Digital_board.16
pads on no net: IC1.3 IC1.7 Internal_power_board.23 Internal_power_board.24 Output_board.4 Output_board.18 Output_board.19 Output_board.21 Output_board.30

## Polygon pours and split planes (outlines as drawn)
AGND on Int1 (GND) "AGND_L02_P019" (solid, pour order 19): -67.818,-18.669 -64.643,-18.669 -56.769,-26.543 -52.197,-26.543 -49.022,-23.368 -49.022,-18.288 -37.465,-18.288 -37.211,-18.542 -37.211,-20.574 -37.592,-20.955 -42.545,-20.955 -50.673,-29.083 -61.595,-29.083 -67.818,-22.86
DGND on Int1 (GND) "DGND_L02_P000" (solid, pour order 0): -30.607,-22.034 -30.607,-47.053 22.479,-47.053 22.479,2.984 -19.177,2.984 -19.177,-22.034
DGND on Int1 (GND) "DGND_L02_P006" (solid, pour order 6): -27.559,-21.463 -27.559,-46.736 -67.818,-46.736 -67.818,-29.616 -59.906,-29.682 -59.977,-40.208 -49.657,-40.208 -49.657,-29.083 -42.037,-21.463 -29.083,-21.463
AGND on Int1 (GND) "AGND_L02_P014" (solid, pour order 14): -23.622,-9.525 -28.702,-9.525 -28.829,-9.652 -28.702,-9.779 -28.702,-21.209 -23.749,-21.209
AGND on Int1 (GND) "AGND_L02_P013" (solid, pour order 13): -39.624,-21.336 -38.481,-21.336 -22.987,-21.336 -22.987,3.429 -36.449,3.429 -36.449,-14.859 -37.973,-16.383 -39.37,-16.383
AGND on Int1 (GND) "AGND_L02_P011" (solid, pour order 11): -67.818,3.335 -67.818,-17.874 -35.052,-17.874 -35.052,3.335
+5V on Int2 (PWR) "+5V_L03_P009" (solid, pour order 9): -27.559,-11.43 -37.719,-21.59 -42.164,-21.59 -49.784,-29.21 -49.784,-41.565 -62.357,-41.565 -62.357,-29.21 -67.945,-29.21 -67.945,-46.609 -37.084,-46.609 -37.084,-27.305 -27.559,-17.78
+3.3V on Int2 (PWR) "+3.3V_L03_P017" (solid, pour order 17): -2.54,-9.017 -13.928,-20.405 -19.564,-20.451 -21.528,-21.666 -28.829,-21.59 -28.829,-46.101 -28.702,-46.228 -2.286,-46.228
-15V on Int2 (PWR) "-15V_L03_P016" (solid, pour order 16): -67.945,-11.303 -67.945,-16.383 -33.401,-16.383 -28.194,-11.176 -22.987,-11.176 -22.987,-6.477 -23.114,-6.35 -45.085,-6.35 -50.038,-11.303
+15V on Int2 (PWR) "+15V_L03_P015" (solid, pour order 15): -67.818,3.556 -23.114,3.556 -23.114,-6.35 -67.818,-6.35
+3.3V on Int2 (PWR) "+3.3V_L03_P004" (solid, pour order 4): -2.54,-9.017 -2.54,-46.609 -2.794,-46.355 -28.829,-46.355 -28.829,-21.59 -3.81,-21.59 -3.81,-9.149
+5V on Int2 (PWR) "+5V_L03_P003" (solid, pour order 3): -2.54,8.382 -22.733,-11.811 -28.194,-11.811 -28.194,-16.51 -11.43,-16.51 -3.81,-8.89 -3.683,-9.017 -2.54,-9.017
+3.3V on Int2 (PWR) "+3.3V_L03_P002" (solid, pour order 2): 24.13,-6.35 3.81,-6.35 1.27,-8.89 -3.81,-8.89 -3.81,-46.482 24.257,-46.482
+5V on Int2 (PWR) "+5V_L03_P001" (solid, pour order 1): 24.13,3.302 24.13,-6.35 3.81,-6.35 1.27,-8.89 -3.81,-8.89 -3.81,3.429
+3.3V on Bottom Layer "+3.3V_L04_P010" (solid, pour order 10): -47.752,-27.178 -42.164,-21.59 -21.538,-21.62 -21.464,-17.691 -11.303,-17.78 -3.81,-10.287 -3.81,-9.271 24.257,-9.271 24.257,-46.482 -47.752,-46.482
+3.3V on Bottom Layer "+3.3V_L04_P018" (solid, pour order 18): -46.232,-42.418 -46.355,-46.59 -48.895,-46.609 -67.945,-46.609 -67.945,-29.972 -62.611,-29.972 -62.611,-42.418 -49.022,-42.418

## Keep-outs
Keep-Out Layer:
  lines w0.15: -52.875,-37.815 cw(c-54.5,-35) -51.25,-35 -52.875,-37.815 ; -52.875,-24.815 cw(c-54.5,-22) -51.25,-22 -52.875,-24.815 ; -22.225,-28.194 -22.225,-17.78 -9.906,-17.78 -6.096,-21.59 -10.287,-21.59 -11.684,-20.193 -19.685,-20.193 -19.685,-25.908 -11.938,-25.908 -10.414,-24.384 -5.969,-24.384 -9.779,-28.194 -22.225,-28.194
  lines w0.254: -69.73,-46.59 26.27,-46.59 26.27,3.41 -69.73,3.41 -69.73,-46.59

## Silkscreen, mask and mechanical layers (free items; w line width, h text height)
Top Overlay:
  text "GLIN-Out" at -58.636,-14.404 h2 r90
  text "ADA-IN" at -58.813,-25.888 h2 r90
  text "MODULES / SIDE / HERE" at 3.215,-29.083 h3
  text "Internal / Temperature / Sensor" at -20.044,-33.501 h2
  text "! REVERSE !" at -34.169,-33.945 h1.5 r90
  text "ADA-OUT" at -58.813,-39.531 h2 r90
Bottom Overlay:
  text "OUTER / SIDE / HERE" at 17.602,-7.747 h3
  text "Micron-GLIN v.2 / (c)Shodan (Tula, Russia) / https://ampnuts.com" at 5.793,-43.889 h2.4 r270
Top Paste:
  lines w0.254: -88.725,-57.3 41.275,-57.3 41.275,12.7 -88.725,12.7 -88.725,-57.3

## Dimensions
-37.338,5.207 to -54.483,-9.906 on Mechanical 1
-49.657,3.429 to -49.276,-10.033 on Mechanical 1
-56.261,-21.59 to -57.785,-34.798 on Mechanical 1
-54.5,-10 to -57.74,-21.627 on Mechanical 1
-54.5,-35 to -69.543,-19.957 on Mechanical 1
26.27,-46.59 to -16.256,-45.847 on Mechanical 1
26.27,-46.59 to -69.73,-46.59 on Mechanical 1
24.27,1.27 to 26.27,3.41 on Mechanical 13
-37.36,1.27 to -62.68,1.27 on Mechanical 1
-23.73,1.27 to -37.36,1.27 on Mechanical 1
-38.63,0 to -69.73,3.41 on Mechanical 1
23,0 to 26.27,3.41 on Mechanical 1
23,-43.18 to 26.27,-46.59 on Mechanical 1
1.27,1.27 to -23.73,1.27 on Mechanical 1
24.27,1.27 to 1.27,1.27 on Mechanical 1

## Text inside footprints (layer, text, board x,y; h text height)
DAC_board: Bottom Overlay "36" at -29.718,-42.418 h1.52 r90; Bottom Overlay "35" at -21.082,-42.291 h1.52 r90; Bottom Overlay "1" at -21.463,1.016 h1.52 r90; Bottom Overlay "2" at -29.591,0.635 h1.52 r90
Digital_board: Bottom Overlay "2" at 15.875,1.27 h1.52 r90; Bottom Overlay "1" at 18.161,1.016 h1.52 r90; Bottom Overlay "35" at 18.923,-42.291 h1.52 r90; Bottom Overlay "36" at 16.256,-42.418 h1.52 r90
Internal_power_board: Top Overlay "1" at -68.961,0.381 h1.27; Top Overlay "2" at -61.468,0 h1.27
Output_board: Bottom Overlay "2" at -36.979,-45.466 h1.52 r270; Bottom Overlay "1" at -42.821,-45.466 h1.52 r270
Timebase_board: Bottom Overlay "36" at -4.699,-42.545 h1.52 r90; Bottom Overlay "35" at 3.683,-42.418 h1.52 r90; Bottom Overlay "1" at 3.302,0.762 h1.52 r90; Bottom Overlay "2" at -4.699,0 h1.52